# Altium PCB ADS-228.PcbDoc
Units mm, origin at the board's own origin, x right, y up, seen from the top; angles counter-clockwise.
Board outline 42 x 48 mm, 2 copper layers (Top Layer, Bottom Layer); 24 components, 21 nets, 73 pads, 0 vias.
Unrouted connection lines stored in the file: 1.
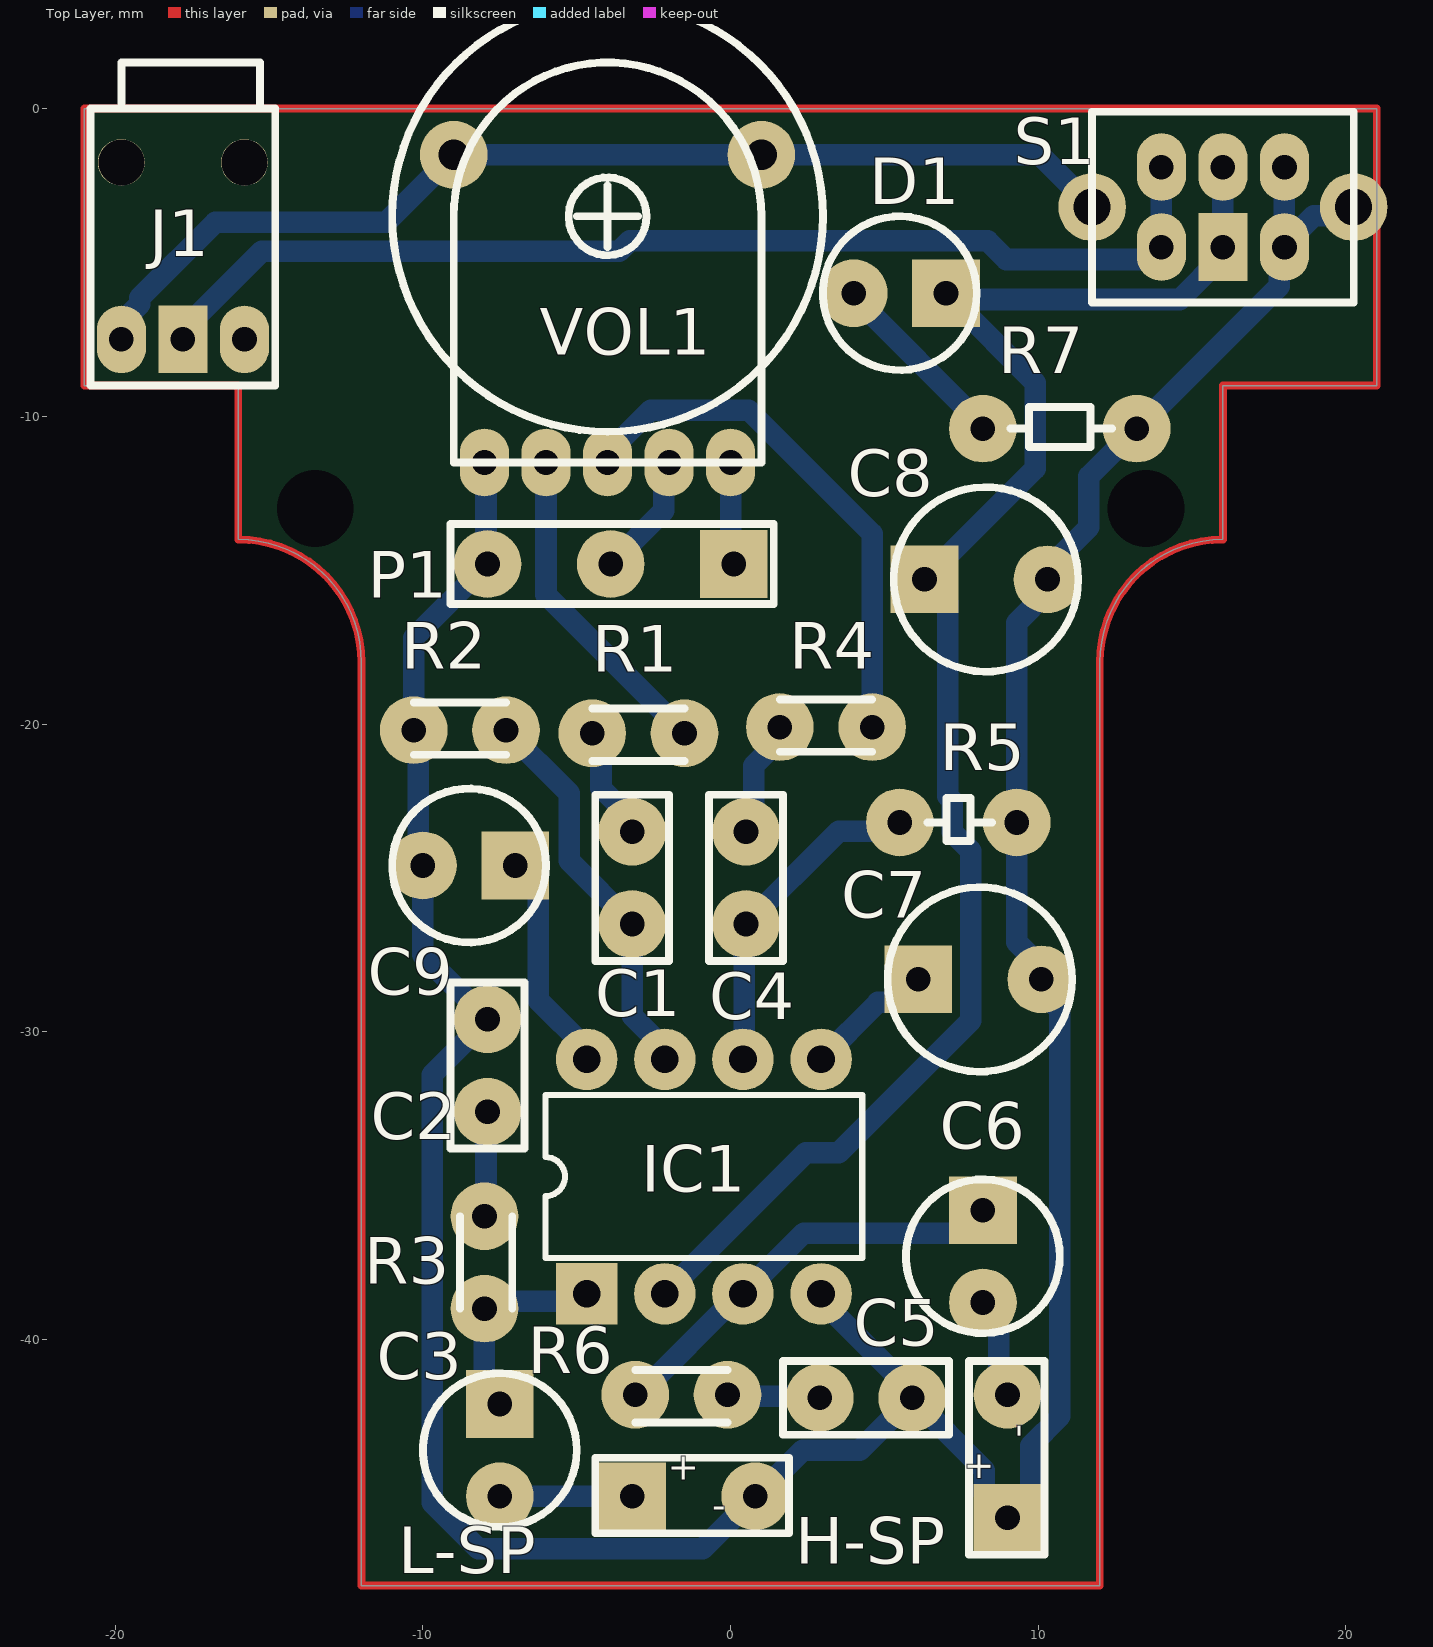
[diagram p0: Top Layer view]
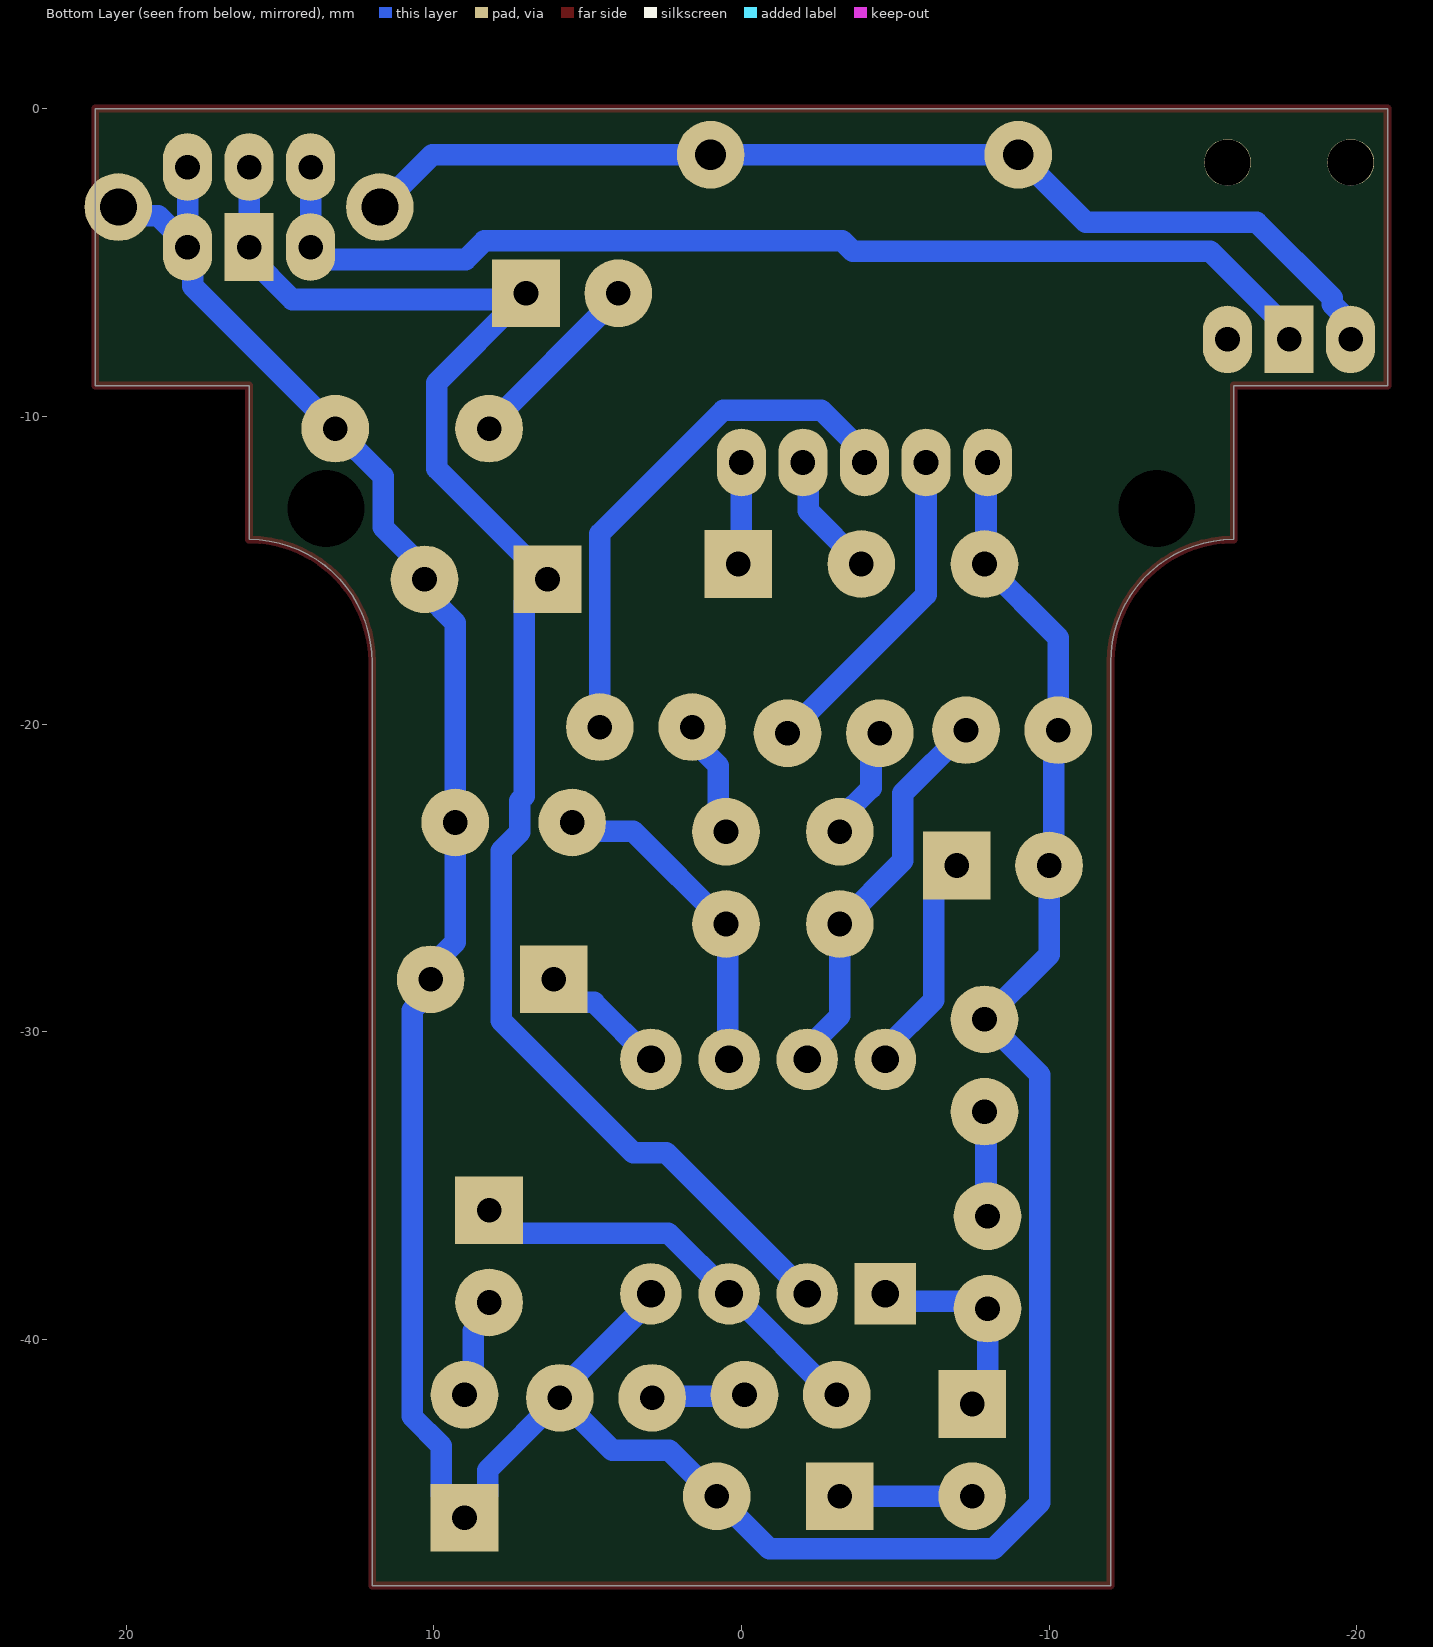
[diagram p1: Bottom Layer view, seen from below]

## Layer stack, top to bottom
Top Solder: solder mask 0.0102, Solder Resist, Dk 3.5
Top Layer: signal copper 0.0356
Dielectric 1: dielectric 0.32, FR-4, Dk 4.8
Bottom Layer: signal copper 0.0356
Bottom Solder: solder mask 0.0102, Solder Resist, Dk 3.5

## Board outline
-12,-18 ccw(c-16,-18) -16,-14 -16,-9 -21,-9 -21,0 21,0 21,-9 16,-9 16,-14 ccw(c16,-18) 12,-18 12,-48 -12,-48 -12,-19

## Design rules (kind name [scope] priority, off if disabled: settings)
Clearance [All] p1: gap=0.254 ignorepadtopadclearanceinfootprint=FALSE except(0: Arc-Hole Track-Hole SMDPad-Hole THPad-Hole Via-Hole Fill-Hole Poly-Hole Region-Hole Text-Hole)
PolygonConnect [All] p1: connectstyle=Relief reliefconductorwidth=0.254 reliefentries=4 polygonreliefangle="90 Angle" airgapwidth=0.254
RoutingLayers [All] p1: top layer_v5=FALSE bottom layer_v5=TRUE
RoutingVias [All] p1: holewidth=0.711 width=1.27 viastyle="Through Hole" minholewidth=0.711 minwidth=1.27 maxholewidth=0.711 maxwidth=1.27
SolderMaskExpansion [All] p1: expansion=0.102
Width GND [All] p1: maxlimit=1 minlimit=0.2 preferedwidth=0.7 minimp=50.000000 maximp=50.000000 favimp=50.000000
Width ALL [All] p2: maxlimit=1 minlimit=0.2 preferedwidth=0.5 minimp=50.000000 maximp=50.000000 favimp=50.000000
29 further rules are at their usual default settings.

## Components (designator, comment, footprint, x,y, rotation, side; value= is the part's Value field where it differs from the comment)
C1 "Cap" RAD3 -3.2,-23.5 r270 top value=104p
C2 "Cap" RAD3 -7.9,-32.6 r90 top value=104p
C3 "Cap Pol1" CAPPR3-5 -7.5,-42.1 r270 top value=220u
C4 "Cap" RAD3 0.5,-23.5 r270 top value=104p
C5 "Cap" RAD3 2.9,-41.9 r0 top value=104p
C6 "Cap Pol1" CAPPR3-5 8.2,-35.8 r270 top value=220u
C7 "Cap Pol1" CAPPR4-6 6.1,-28.3 r0 top value=100u
C8 "Cap Pol1" CAPPR4-6 6.3,-15.3 r0 top value=470u
C9 "Cap Pol1" CAPPR3-5 -7,-24.6 r180 top value=100u
D1 "LED1" LED 7,-6 r180 top locked
H-SP "SPEAKER" SPAKER2 9,-45.8 r90 top
IC1 "D2822" DIP8 -4.68,-38.52 r0 top
J1 "PWR2.5" DC -17.8,-7.5 r180 top locked
L-SP "SPEAKER" SPAKER2 -3.2,-45.1 r0 top
P1 "PLUG" HDR1X3 0.1,-14.8 r180 top
R1 "Res1" AXIAL3 -4.5,-20.3 r0 top value=4.7K
R2 "Res1" AXIAL3 -7.3,-20.2 r180 top value=1K
R3 "Res1" AXIAL3 -8,-39 r90 top value=4.7R
R4 "Res1" AXIAL3 4.6,-20.1 r180 top value=4.7K
R5 "Res1" AXIAL3.8 9.3,-23.2 r180 top value=1K
R6 "Res1" AXIAL3 -3.1,-41.8 r0 top value=4.7R
R7 "Res1" AXIAL5 13.2,-10.4 r180 top value=1K
S1 "SW-SPST" SW 16,-4.5 r0 top locked
VOL1 "RPOT" VR -4,-11.5 r180 top locked value=50K

## Footprints (in the part's own frame and the unit in brackets; to place one, negate y for a bottom-side part, rotate by r counter-clockwise, add the part's x,y. Pads: shape width x height; smd on the part's side, far side on the other; paste and mask are expansions set on the pad)
AXIAL3 [mm]
  round 2.2 hole 0.8: 1(0,0) 2(3,0)
  silkscreen extent 0,-0.9 3,0.8
AXIAL3.8 [mm]
  round 2.2 hole 0.8: 1(0,0) 2(3.8,0)
  silkscreen extent 0.8,-0.8 2.9,0.6
AXIAL5 [mm]
  round 2.2 hole 0.8: 1(0,0) 2(5,0)
  silkscreen extent 0.8,-0.7 4.1,0.6
CAPPR3-5 [mm]
  rect 2.2x2.2 hole 0.8: 1(0,0)
  round 2.2 hole 0.8: 2(3,0)
  silkscreen extent -1,-2.5 4,2.5
CAPPR4-6 [mm]
  rect 2.2x2.2 hole 0.8: 1(0,0)
  round 2.2 hole 0.8: 2(4,0)
  silkscreen extent -1,-3 5,3
DC [mm]
  round 1 on Top Overlay: 0(-2,-5.95) 0(2,-5.95)
  rect 1.6x2.2 hole 0.8: 1(0,0)
  oval 1.6x2.2 hole 0.8: 2(2,0) 3(-2,0)
  silkscreen extent -3,-9 3,1.5
DIP8 [mm]
  rect 2x2 hole 0.9: 1(0,0)
  round 2 hole 0.9: 2(2.54,0) 3(5.08,0) 4(7.62,0) 5(7.62,7.62) 6(5.08,7.62) 7(2.54,7.62) 8(0,7.62)
  silkscreen extent -1.34,1.16 8.96,6.46
HDR1X3 [mm]
  rect 2.2x2.2 hole 0.8: 1(0,0)
  round 2.2 hole 0.8: 2(4,0) 3(8,0)
  silkscreen extent -1.3,-1.3 9.2,1.3
LED [mm]
  rect 2.2x2.2 hole 0.8: 1(0,0)
  round 2.2 hole 0.8: 2(3,0)
  silkscreen extent -1,-2.5 4,2.5
RAD3 [mm]
  round 2.2 hole 0.8: 1(0,0) 2(3,0)
  silkscreen extent -1.2,-1.2 4.2,1.2
SPAKER2 [mm]
  rect 2.2x2.2 hole 0.8: 1(0,0)
  round 2.2 hole 0.8: 2(4,0)
  silkscreen extent -1.2,-1.2 5.1,1.25
SW [mm]
  round 2.2 hole 1.2: 0(-4.25,1.3) 0(4.25,1.3)
  oval 1.6x2.2 hole 0.8: 0(2,0) 0(2,2.6) 1(0,2.6) 2(-2,0) 2(-2,2.6)
  rect 1.6x2.2 hole 0.8: 1(0,0)
  silkscreen extent -4.25,-1.8 4.25,4.4
VR [mm]
  round 2.2 hole 1: 0(-5,-10) 0(5,-10)
  oval 1.6x2.2 hole 0.8: 1(-2,0) 2(4,0) 3(2,0) 4(-4,0) 5(0,0)
  silkscreen extent -7,-15 7,0

## Part data
C1 C2 C4 C5: "Capacitor", LatestRevisionDate=17-Jul-2002, LatestRevisionNote="Re-released for DXP Platform.", PackageReference=RAD-0.3, Published=8-Jun-2000, Publisher="Altium Limited"
C3 C6 C7 C8 C9: "Polarized Capacitor (Radial)", LatestRevisionDate=17-Jul-2002, LatestRevisionNote="Re-released for DXP Platform.", PackageReference=RB7.6-15, Published=8-Jun-2000, Publisher="Altium Limited"
D1: "Typical RED GaAs LED", LatestRevisionDate=08-Jul-2005, LatestRevisionNote="Mech Layer 1 removed.", PackageReference=LED-1, Published=8-Jun-2000, Publisher="Altium Limited"
J1: "Low Voltage Power Supply Connector", ComponentLink1Description="Manufacturer Link", ComponentLink1URL=http://domino.kycon.com/internet/Products.html, DatasheetDocument=09-May-2002, Published=17-Dec-2003, Publisher="Altium Limited"
R1 R2 R3 R4 R5 R6 R7: "Resistor", LatestRevisionDate=17-Jul-2002, LatestRevisionNote="Re-released for DXP Platform.", PackageReference=AXIAL-0.3, Published=8-Jun-2000, Publisher="Altium Limited"
S1: "Single-Pole, Single-Throw Switch", LatestRevisionDate=17-Jul-2002, LatestRevisionNote="Re-released for DXP Platform.", PackageReference=SPST-2, Published=24-Mar-1999, Publisher="Altium Limited"

## Free pads (board coordinates)
  round 1.524 hole 1.5: 5(-19.8,-1.75) 6(-15.8,-1.75)
  round 1.524 hole 2.5: 7(-13.5,-13) 8(13.5,-13)

## Nets (pads, with @x,y where several pads share a name; then routed paths per layer and width w, separated by ;. In a path a pad name is that pad's centre, name@x,y a point inside that pad or via, vN(x,y) a via of type N, cw(c..) or ccw(c..) an arc to the next point about the centre after c; other vN are vias at no path point)
GND: C2.2 C5.2 C7.2 C8.2 C9.2 H-SP.1 IC1.4 J1.2 L-SP.2 P1.3 R2.2 R5.1 R7.1 S1.0 VOL1.0 VOL1.2 | length 151.4
  Bottom Layer w0.7: J1.2 -19.8,-6.956 -19.204,-6.36 -19.204,-6.15 -16.742,-3.687 -11.187,-3.687 -9,-1.5 1,-1.5 10.05,-1.5 S1.0@11.75,-3.2 ; VOL1.2 -7.95,-11.55 -7.95,-14.75 P1.3 -10.3,-17.2 R2.2 -10.15,-20.35 -10.15,-24.45 C9.2 -10,-27.5 C2.2 -9.704,-31.404 -9.704,-45.306 -8.206,-46.804 -0.904,-46.804 L-SP.2 0.849,-45.1 2.345,-43.604 4.196,-43.604 C5.2 ; IC1.4 2.94,-38.73 5.9,-41.69 C5.2 ; S1.0@18,-1.9 S1.0@18,-4.444 ; S1.0@20.25,-3.2 19.963,-3.487 18.957,-3.487 S1.0@18,-4.444 ; C5.2 8.25,-44.25 8.25,-45.05 H-SP.1 9.75,-45.05 9.75,-43.46 10.704,-42.506 10.704,-29.31 10.1,-28.706 C7.2 10.1,-27.894 9.3,-27.094 R5.1 9.3,-16.706 10.3,-15.706 C8.2 10.3,-14.951 11.646,-13.605 11.646,-11.954 R7.1 17.828,-5.772 17.828,-4.672 18,-4.5 S1.0@18,-4.444
NetBT1_1: J1.1 S1.2 | length 36.3
  Bottom Layer w0.7: J1.1 -17.8,-7.2 -15.241,-4.641 -3.618,-4.641 -3.273,-4.296 8.35,-4.296 8.958,-4.904 13.596,-4.904 14,-4.5 S1.2@14,-1.9
NetBT1_2: J1.3
NetC1_1: C1.1 R1.1 | length 3.7
  Bottom Layer w0.7: R1.1 -4.213,-20.587 -4.213,-22.081 -3.2,-23.094 C1.1
NetC1_2: C1.2 IC1.7 R2.1 | length 12.8
  Bottom Layer w0.7: R2.1 -5.25,-22.25 -5.25,-24.45 C1.2 -3.2,-29.488 -2.14,-30.548 IC1.7
NetC2_1: C2.1 R3.2 | length 3.4
  Bottom Layer w0.7: R3.2 -7.95,-35.95 -7.95,-32.65 C2.1
NetC3_1: C3.1 IC1.1 R3.1 | length 6.8
  Bottom Layer w0.7: C3.1 -8,-41.6 R3.1 -7.76,-38.76 -4.92,-38.76 IC1.1
NetC3_2: C3.2 L-SP.1 | length 4.3
  Bottom Layer w0.7: C3.2 L-SP.1
NetC4_1: C4.1 R4.2 | length 3.9
  Bottom Layer w0.7: C4.1 0.756,-23.244 0.756,-21.35 1.6,-20.506 R4.2
NetC4_2: C4.2 IC1.6 R5.2 | length 10.8
  Bottom Layer w0.7: IC1.6 0.45,-30.85 0.45,-26.55 C4.2 3.513,-23.487 5.213,-23.487 R5.2
NetC5_1: C5.1 R6.2 | length 3
  Bottom Layer w0.7: R6.2 -0.05,-41.85 2.85,-41.85 C5.1
NetC6_1: C6.1 IC1.3 R6.1 | length 13.8
  Bottom Layer w0.7: R6.1 -2.99,-41.8 0.29,-38.52 IC1.3 2.37,-36.55 7.45,-36.55 C6.1
NetC6_2: C6.2 H-SP.2 | length 3.3
  Bottom Layer w0.7: C6.2 8.2,-39.206 8.713,-39.719 8.713,-41.513 H-SP.2
NetC7_1: C7.1 IC1.5 | length 4.2
  Bottom Layer w0.7: IC1.5 4.79,-29.05 5.35,-29.05 C7.1
NetC8_1: C8.1 D1.1 IC1.2 S1.1 | length 52.9
  Bottom Layer w0.7: IC1.2 2.439,-33.941 3.514,-33.941 7.804,-29.65 7.804,-24.114 7.204,-23.514 7.204,-22.494 7.05,-22.34 7.05,-16.05 C8.1 9.904,-11.696 9.904,-8.904 D1.1@7.204,-6.204 ; D1.1 D1.1@7.204,-6.204 ; S1.1@16,-1.9 16,-4.5 16,-4.8 14.596,-6.204 D1.1@7.204,-6.204
NetC9_1: C9.1 IC1.8 | length 7.3
  Bottom Layer w0.7: C9.1 -6.25,-25.35 -6.25,-28.978 -4.68,-30.548 IC1.8
NetD1_2: D1.2 R7.2 | length 6.1
  Bottom Layer w0.7: D1.2 4,-6.1 8.2,-10.3 R7.2
NetP1_1: P1.1 VOL1.4 | length 3.3
  Bottom Layer w0.7: VOL1.4 0,-14.7 P1.1
NetP1_2: P1.2 VOL1.1 | length 4.1
  Bottom Layer w0.7: P1.2 -2.172,-13.072 -2.172,-11.672 VOL1.1
NetR1_2: R1.2 VOL1.3 | length 10.7
  Bottom Layer w0.7: VOL1.3 -6,-15.8 R1.2
NetR4_1: R4.1 VOL1.5 | length 17.4
  Bottom Layer w0.7: VOL1.5 -4,-11.2 -2.596,-9.796 0.582,-9.796 4.596,-13.81 4.596,-20.096 R4.1
pads on no net: J1.0
copper on no net: | length 176.6
  Top Layer w0.254: -21,-9 -21,0 21,0 21,-9 16,-9 16,-14 ccw(c16,-18) 12,-18 12,-48 -12,-48 -12,-19 -12,-18 ccw(c-16,-18) -16,-14 -16,-9 -21,-9

## Text inside footprints (layer, text, board x,y; h text height)
H-SP: Top Overlay "-" at 10,-43.2 h1.52 r90; Top Overlay "+" at 8.75,-44.65 h1.52 r90
L-SP: Top Overlay "-" at -0.6,-46.1 h1.52; Top Overlay "+" at -2.05,-44.85 h1.52